# Altium PCB ESP_Layout_2.1.PcbDoc
Units mm, origin at the board's own origin, x right, y up, seen from the top; angles counter-clockwise.
Board outline 96.52 x 58.42 mm, 2 copper layers (Top Layer, Bottom Layer); 39 components, 25 nets, 166 pads, 23 vias.
Unrouted connection lines stored in the file: 46.
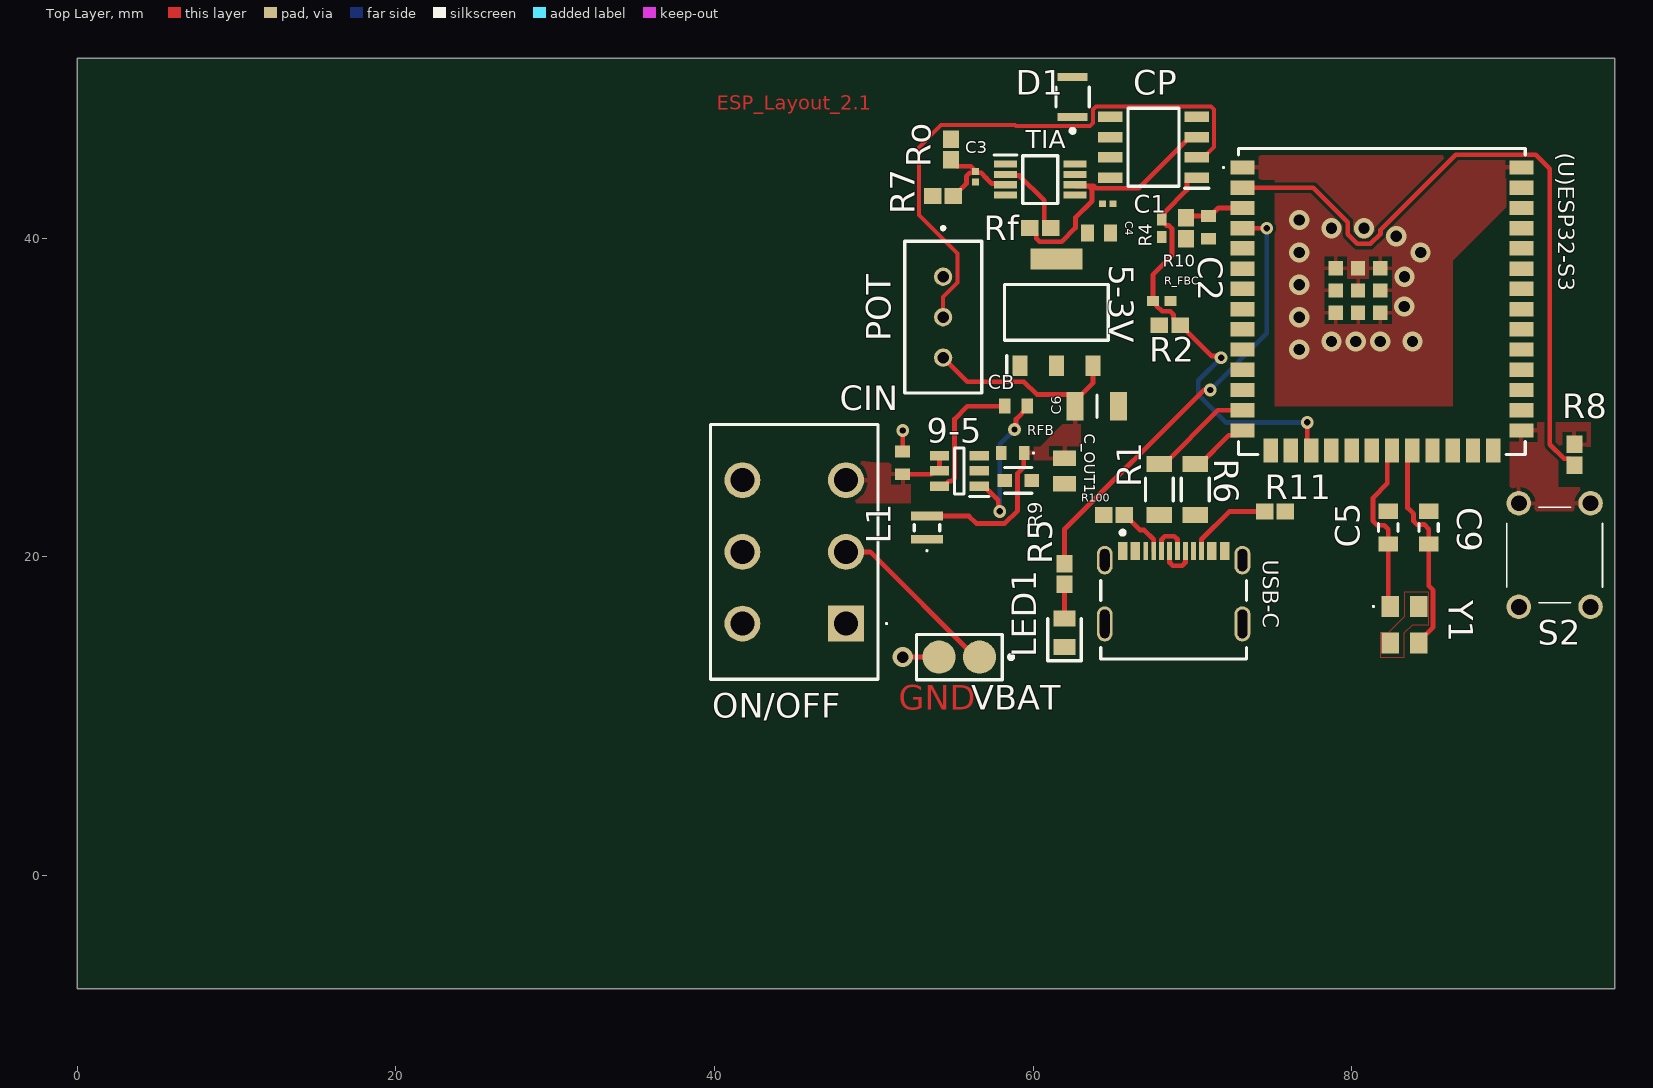
[diagram p0: Top Layer view]
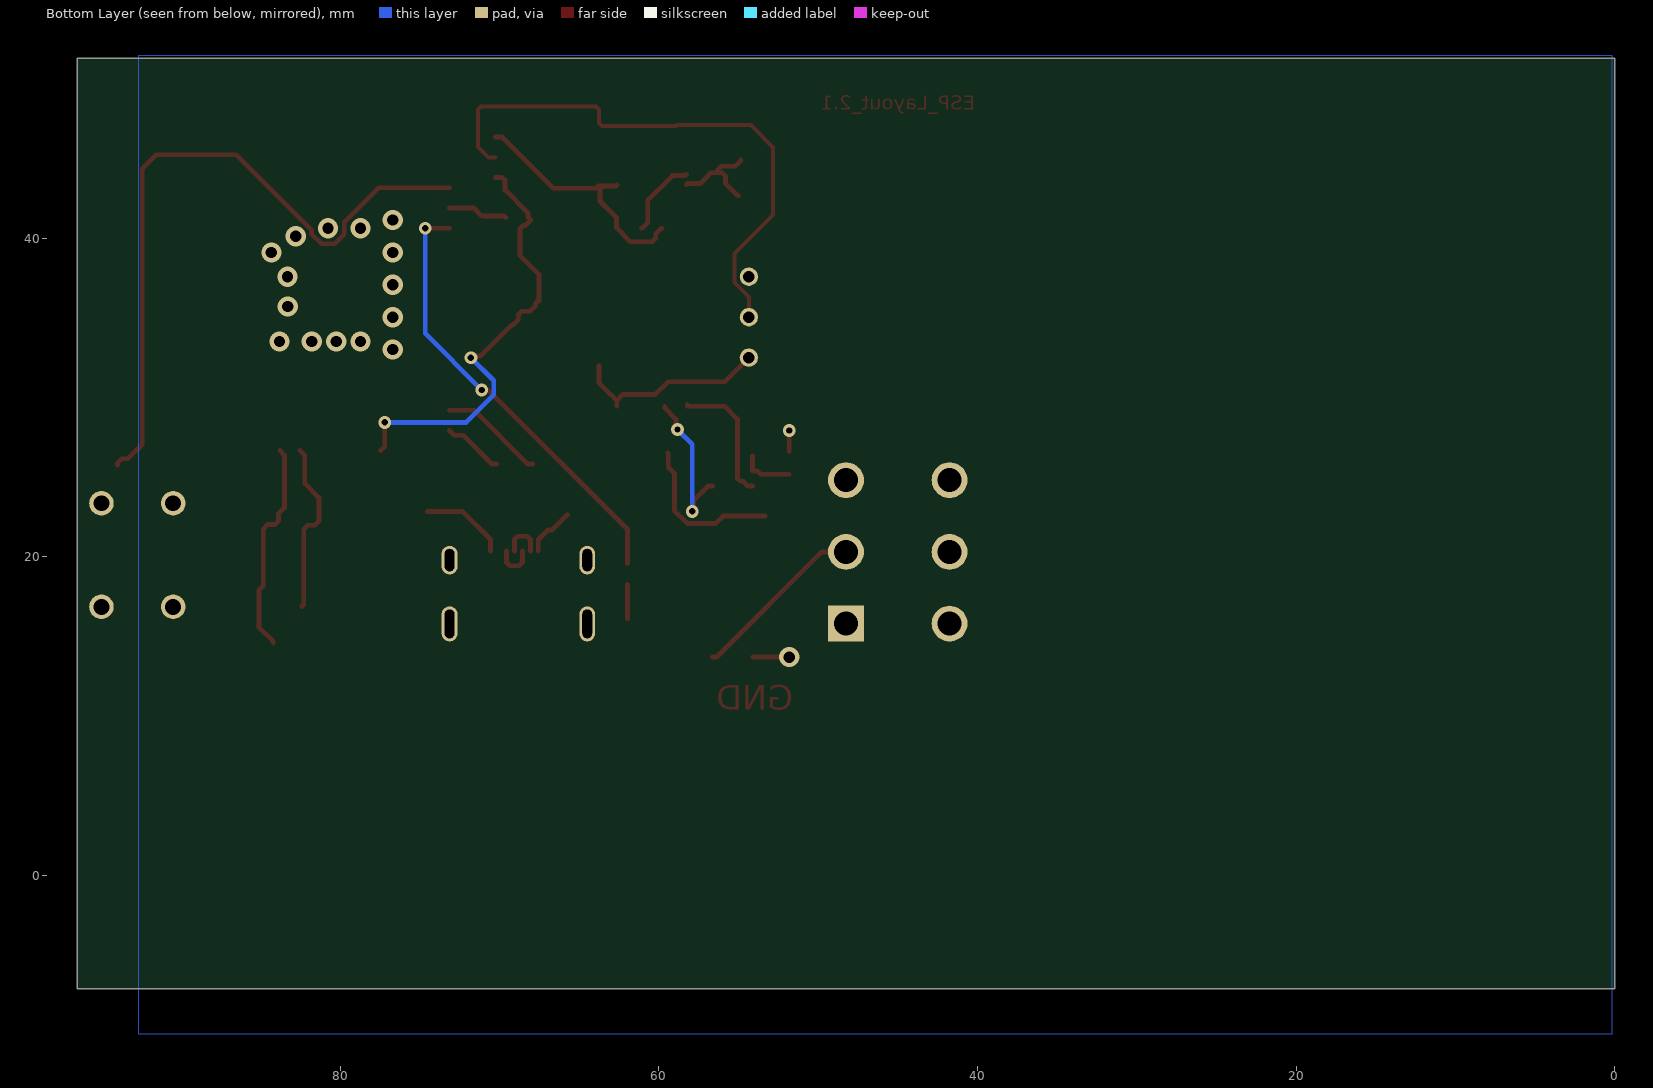
[diagram p1: Bottom Layer view, seen from below]
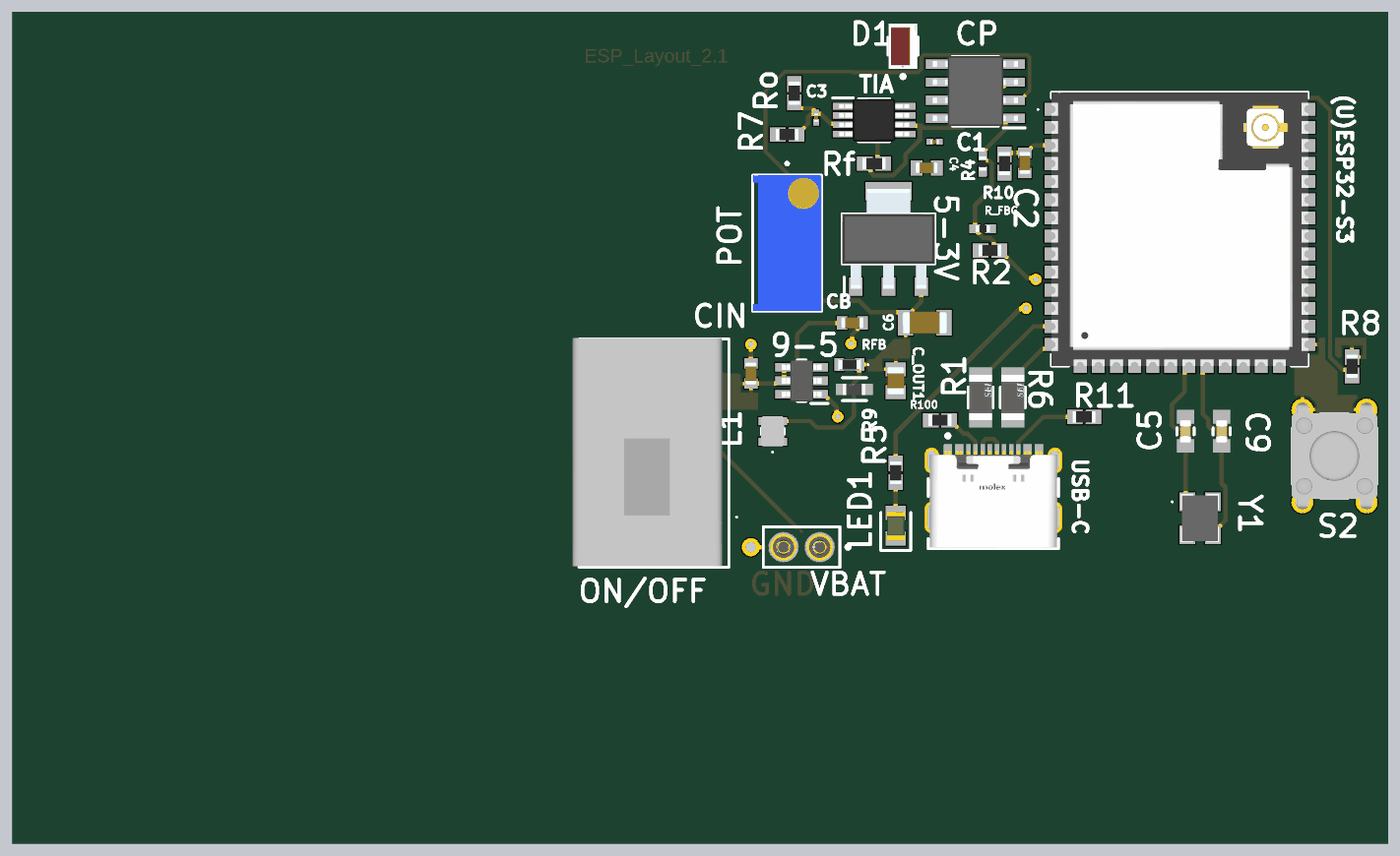
[diagram p2: 3D render of the assembled board from above, using the file's embedded part models]

## Layer stack, top to bottom
Top Solder: solder mask 0.0102, Solder Resist, Dk 3.5
Top Layer: signal copper 0.0356
Dielectric 1: dielectric 0.32, FR-4, Dk 4.8
Bottom Layer: signal copper 0.0356
Bottom Solder: solder mask 0.0102, Solder Resist, Dk 3.5

## Board outline
0,-7.112 0,51.308 96.52,51.308 96.52,-7.112

## Design rules (kind name [scope] priority, off if disabled: settings)
Clearance [All] p1: gap=0.2 ignorepadtopadclearanceinfootprint=FALSE
DiffPairsRouting [All] p1: maxlimit=0.254 minlimit=0.254 mostfreqgap=0.254 toplayer_minwidth=0.381 toplayer_maxwidth=0.381 toplayer_prefwidth=0.381 bottomlayer_minwidth=0.381 bottomlayer_maxwidth=0.381 bottomlayer_prefwidth=0.381 maxuncoupledlength=12.7
HoleSize [All] p1: absolutevalues=TRUE maxlimit=5 minlimit=0.3 maxpercent=80.000 minpercent=20.000
MinimumSolderMaskSliver [All] p1: minsoldermaskwidth=0.102
PolygonConnect [All] p1: thpad.connectstyle=Relief thpad.reliefconductorwidth=0.254 thpad.reliefentries=4 thpad.polygonreliefangle="90 Angle" thpad.airgapwidth=0.254 smdpad.connectstyle=Relief smdpad.reliefconductorwidth=0.254 smdpad.reliefentries=4 smdpad.polygonreliefangle="90 Angle" smdpad.airgapwidth=0.254 via.connectstyle=Direct via.reliefconductorwidth=0.254 via.reliefentries=4 via.polygonreliefangle="90 Angle" via.airgapwidth=0.254
RoutingVias [All] p1: holewidth=0.4 width=0.8 viastyle="Through Hole" minholewidth=0.3 minwidth=0.7 maxholewidth=0.7 maxwidth=1
SilkToSolderMaskClearance [IsPad] p1: minsilkscreentomaskgap=0.15 clearancetoexposedcopper=TRUE
SolderMaskExpansion [All] p1: expansion=0.102 istentingtop=FALSE
SupplyNets "Schematic Supply Nets_4" [InNet('GND')] p1: voltage=0.000
SupplyNets "Schematic Supply Nets_3" [InNet('5V_CLEAN')] p2: voltage=0.000
SupplyNets "Schematic Supply Nets_2" [InNet('VBAT_SW')] p3: voltage=0.000
SupplyNets "Schematic Supply Nets_1" [InNet('3V3_CLEAN')] p4: voltage=0.000
SupplyNets "Schematic Supply Nets" [InNet('VBAT')] p5: voltage=0.000
Width [All] p1: maxlimit=1 minlimit=0.2 preferedwidth=0.3
26 further rules are at their usual default settings.

## Classes and differential pairs
component class V_Reg: 5-3V 9-5 C4 C6 C_OUT1 CB CIN L1 ON/OFF R9 RFB VBAT
component class Receiver: C1 C3 CP D1 pot R2 R4 R7 R_FBC Rf Ro TIA
component class ESP: (U)ESP32-S3 C2 C5 C9 LED1 R1 R5 R6 R8 R10 R11 R100 S2 USB-C Y1
differential pair USB: +USB_P -USB_N

## Components (designator, comment, footprint, x,y, rotation, side; value= is the part's Value field where it differs from the comment)
5-3V "AMS1117-3.3" SOT229P700X180-4N 61.468,35.354 r90 top (schematic designator IC3)
9-5 "LMR50410Y5FQDBVRQ1" SOT95P280X145-6N 55.372,25.4 r180 top
(U)ESP32-S3 "ESP32-S3-WROOM-1U-N8R8" ESP32S3WROOM1UN8R8 81.902,36.04 r0 top (schematic designator IC1)
C1 "0.1uF" CAPC0603X33N 64.694,42.164 r180 top
C2 "1uF" CAPC1608X90N 71.026,40.69 r270 top
C3 "0.1uF" CAPC0603X33N 56.388,43.866 r90 top
C4 "22uF" CAPC1608X105N 64.145,40.346 r180 top
C5 "8pF" FP-CGA3E-0_3-0_1-IPC_A 82.296,21.844 r90 top
C6 "10uF" CAPC3216X180N 64.008,29.464 r180 top
C9 "8pF" FP-CGA3E-0_3-0_1-IPC_A 84.836,21.844 r90 top
C_OUT1 "10uF" CAPC2012X140N 61.976,25.4 r270 top (schematic designator C_CLEAN)
CB "0.1uF" CAPC1608X90N 58.928,29.464 r180 top
CIN "2.2uF" CAPC1608X90N 51.816,25.908 r90 top
CP "LM393DR2GH" SOIC127P600X175-8N 67.564,45.72 r180 top (schematic designator IC4)
D1 "SFH 2713" FP-SFH_2713-MFG 62.484,48.877 r90 top
L1 "4.7uH" 621767970 53.34,21.844 r90 top
LED1 "LTST-C170GKT" LEDC2012X120N 61.976,15.24 r90 top
ON/OFF "SLW-1678105-6A-N-D" SLW16781056AND 48.26,15.82 r90 top (schematic designator S1)
POT "3296W-1-104LF" 3296W1503LF 54.356,37.592 r90 top (schematic designator VR1)
R1 "RMCF1206ZT0R00" FP-RMCF1206-MFG 67.926,24.231 r90 top
R2 "10k" RESC1608X55N 68.58,34.544 r180 top
R4 "100k" RESC1005X40N 68.072,40.64 r90 top
R5 "130Ω" RESC1608X55N 61.976,18.938 r90 top
R6 "RMCF1206ZT0R00" FP-RMCF1206-MFG 70.181,24.231 r90 top
R7 "10k" RESC1608X55N 54.356,42.672 r0 top
R8 "10kΩ" RESC1608X55N 93.98,26.416 r270 top
R9 "22.1kΩ" FP-RT0603-MFG 59.078,24.802 r180 top value=22.1KΩ
R10 "10kΩ" RESC1608X55N 69.596,40.64 r270 top
R11 "5.1kΩ" RESC1608X55N 75.184,22.86 r0 top
R100 "5.1kΩ" RESC1608X55N 65.076,22.632 r180 top
R_FBC "100k" RESC1005X40N 68.072,36.068 r180 top
Rf "10k" RESC1608X55N 60.452,40.64 r180 top (schematic designator R3)
RFB "88.7kΩ" ERA3AEB101V 58.729,26.532 r180 top (schematic designator R_FBT)
Ro "10k" RESC1608X55N 54.864,45.578 r90 top (schematic designator R5.1)
S2 "RST_SW" 18259106 94.996,23.368 r270 top
TIA "OPA380AIDGKR" SOP65P490X110-8N 60.452,43.688 r0 top (schematic designator U1)
USB-C "217179-0001" FP-2171790001-MFG 68.821,16.952 r0 top (schematic designator "USB OTG")
VBAT "837-22-002-30-001101" FP-837-22-002-30-001101-MFG 55.372,13.716 r180 top
Y1 "ECS-80-8-33Q-ADS" ECS80833QADS 83.312,15.748 r270 top

## Footprints (in the part's own frame and the unit in brackets; to place one, negate y for a bottom-side part, rotate by r counter-clockwise, add the part's x,y. Pads: shape width x height; smd on the part's side, far side on the other; paste and mask are expansions set on the pad)
3296W1503LF [mm]
  round 1.15 hole 0.71: 1(0,0) 2(-2.54,0) 3(-5.08,0)
  silkscreen extent -7.3,-2.42 3.15,2.41, body extent -7.3,-2.41 2.22,2.41, height 11.54
18259106 [mm]
  round 1.54 hole 0.99: 1(0,0) 2(6.5,0) 3(0,-4.5) 4(6.5,-4.5)
  silkscreen extent 0.25,-5.25 6.25,0.75, body extent -0.65,-5.25 7.15,0.74, height 5.64
621767970 [mm]
  rect 0.55x2 smd: 1(-0.725,0) 2(0.725,0)
  silkscreen extent -1.5,-0.8 0.2,0.8, body extent -1.05,-0.8 1.05,0.8, height 1.1
CAPC0603X33N [mm]
  rect 0.46x0.42 smd: 1(-0.33,0) 2(0.33,0)
  body extent -0.3,-0.15 0.3,0.15, height 0.33
CAPC1608X90N [mm]
  rect 0.73x0.94 smd: 1(-0.71,0) 2(0.71,0)
  body extent -0.8,-0.4 0.8,0.4, height 0.9
CAPC1608X105N [mm]
  rect 0.83x1.07 smd: 1(-0.72,0) 2(0.72,0)
  body extent -0.8,-0.4 0.8,0.4, height 1.05
CAPC2012X140N [mm]
  rect 0.98x1.43 smd: 1(-0.8,0) 2(0.8,0)
  body extent -1,-0.63 1,0.63, height 1.4
CAPC3216X180N [mm]
  rect 1.07x1.78 smd: 1(-1.36,0) 2(1.36,0)
  silkscreen extent 0,-0.7 0,0.7, body extent -1.6,-0.8 1.6,0.8, height 1.8
ECS80833QADS [mm]
  rect 1.3x1.1 smd: 1(-1.15,-0.9) 2(1.15,-0.9) 3(1.15,0.9) 4(-1.15,0.9)
  silkscreen extent -1.2,-2 -1.1,-1.9, body extent -1.69,-1.34 1.69,1.34, height 0.9
ERA3AEB101V [mm]
  rect 0.65x0.9 smd: 1(-0.725,0) 2(0.725,0)
  silkscreen extent -1.35,-0.05 -1.25,0.05, body extent -0.8,-0.4 0.8,0.4, height 0.45
ESP32S3WROOM1UN8R8 [mm]
  rect 1.5x0.9 smd: 1(-8.75,8.41) 2(-8.75,7.14) 3(-8.75,5.87) 4(-8.75,4.6) 5(-8.75,3.33) 6(-8.75,2.06) 7(-8.75,0.79) 8(-8.75,-0.48) 9(-8.75,-1.75) 10(-8.75,-3.02) 11(-8.75,-4.29) 12(-8.75,-5.56) 13(-8.75,-6.83) 14(-8.75,-8.1) 27(8.75,-8.1) 28(8.75,-6.83) 29(8.75,-5.56) 30(8.75,-4.29) 31(8.75,-3.02) 32(8.75,-1.75) 33(8.75,-0.48) 34(8.75,0.79) 35(8.75,2.06) 36(8.75,3.33) 37(8.75,4.6) 38(8.75,5.87) 39(8.75,7.14) 40(8.75,8.41)
  rect 0.9x1.5 smd: 15(-6.985,-9.35) 16(-5.715,-9.35) 17(-4.445,-9.35) 18(-3.175,-9.35) 19(-1.905,-9.35) 20(-0.635,-9.35) 21(0.635,-9.35) 22(1.905,-9.35) 23(3.175,-9.35) 24(4.445,-9.35) 25(5.715,-9.35) 26(6.985,-9.35)
  rect 0.9x0.9 smd: 41(-1.5,0.69) 42(-2.9,2.09) 43(-2.9,0.69) 44(-2.9,-0.71) 45(-1.5,-0.71) 46(-0.1,-0.71) 47(-0.1,0.69) 48(-0.1,2.09) 49(-1.5,2.09)
  silkscreen extent -10,-9.6 9,9.6, body extent -9.01,-9.61 9.01,9.6, height 3.25
FP-837-22-002-30-001101-MFG [mm]
  round 2.08 smd paste+0 mask+0: 1(-1.27,0) 2(1.27,0)
  silkscreen extent -3.38,-1.42 2.69,1.42, body extent -2.64,-1.37 2.64,1.37, height 0.25
FP-2171790001-MFG [mm]
  rrect100% 1x1.8 hole 1.4 slot 0.6 at 0 deg paste-2539.97 mask+0: 1(-4.32,2.85) 2(4.32,2.85)
  rrect100% 1x2.2 hole 1.8 slot 0.6 at 0 deg paste-2539.97 mask+0: 3(-4.32,-1.15) 4(4.32,-1.15)
  rect 0.6x1.15 smd paste+0 mask+0: A1-B12(-3.2,3.425) A4-B9(-2.4,3.425) B1-A12(3.2,3.425) B4-A9(2.4,3.425)
  rect 0.3x1.15 smd paste+0 mask+0: A5(-1.25,3.425) A6(-0.25,3.425) A7(0.25,3.425) A8(1.25,3.425) B5(1.75,3.425) B6(0.75,3.425) B7(-0.75,3.425) B8(-1.75,3.425)
  silkscreen extent -4.57,-3.35 4.57,4.7, body extent -4.92,-3.45 4.92,4.1, height 0.25
FP-CGA3E-0_3-0_1-IPC_A [mm]
  rect 0.956x1.206 smd paste+0 mask+0: 1(-1.025,0) 2(1.025,0)
  silkscreen extent -0.25,-0.6 0.25,0.6, body extent -2,-1.1 2,1.1, height 0.25
FP-RMCF1206-MFG [mm]
  rect 1x1.6 smd paste+0 mask+0: 1(-1.6,0) 2(1.6,0)
  silkscreen extent -0.72,-0.87 0.72,0.87, body extent -2.2,-0.97 2.2,0.97, height 0.25
FP-RT0603-MFG [mm]
  rect 0.9x0.8 smd paste+0 mask+0: 1(-0.85,0) 2(0.85,0)
  silkscreen extent -0.85,-0.81 0.86,0.8, body extent -1.4,-0.55 1.4,0.55, height 0.25
FP-SFH_2713-MFG [mm]
  rect 0.5x1.9 smd paste-1000 mask+0: 1(-1.25,0) 2(1.25,0)
  silkscreen extent -2.25,-1.05 0.63,1.05, body extent -1.75,-1.15 1.75,1.15, height 0.25
LEDC2012X120N [mm]
  rect 1x1.4 smd: 1(-0.9,0) 2(0.9,0)
  silkscreen extent -1.75,-1.05 0.9,1.05, body extent -1.03,-0.63 0.97,0.63, height 1.2
RESC1005X40N [mm]
  rect 0.75x0.6 smd: 1(-0.55,0) 2(0.55,0)
  body extent -0.5,-0.25 0.5,0.25, height 0.4
RESC1608X55N [mm]
  rect 1.1x1 smd: 1(-0.65,0) 2(0.65,0)
  body extent -0.8,-0.4 0.8,0.4, height 0.55
SLW16781056AND [mm]
  rect 2.25x2.25 hole 1.5: 1(0,0)
  round 2.25 hole 1.5: 2(4.5,0) 3(9,0) 4(9,6.5) 5(4.5,6.5) 6(0,6.5)
  silkscreen extent -3.5,-2.6 12.5,8.5, body extent -3.43,-1.52 12.57,8.98, height 13.82
SOIC127P600X175-8N [mm]
  rect 1.525x0.65 smd: 1(-2.712,1.905) 2(-2.712,0.635) 3(-2.712,-0.635) 4(-2.712,-1.905) 5(2.712,-1.905) 6(2.712,-0.635) 7(2.712,0.635) 8(2.712,1.905)
  silkscreen extent -3.47,-2.45 1.6,2.58, body extent -3,-2.45 3,2.45, height 1.75
SOP65P490X110-8N [mm]
  rect 1.45x0.45 smd: 1(-2.175,0.975) 2(-2.175,0.325) 3(-2.175,-0.325) 4(-2.175,-0.975) 5(2.175,-0.975) 6(2.175,-0.325) 7(2.175,0.325) 8(2.175,0.975)
  silkscreen extent -2.9,-1.5 1.1,1.55, body extent -2.45,-1.5 2.45,1.5, height 1.1
SOT95P280X145-6N [mm]
  rect 1.2x0.6 smd: 1(-1.25,0.95) 2(-1.25,0) 3(-1.25,-0.95) 4(1.25,-0.95) 5(1.25,0) 6(1.25,0.95)
  silkscreen extent -1.85,-1.45 0.3,1.6, body extent -1.4,-1.45 1.4,1.45, height 1.2
SOT229P700X180-4N [mm]
  rect 1.3x0.95 smd: 1(-3.35,2.29) 2(-3.35,0) 3(-3.35,-2.29)
  rect 1.3x3.25 smd: 4(3.35,0)
  silkscreen extent -4,-3.25 1.75,3.25, body extent -3.5,-3.25 3.5,3.25, height 1.8

## Part data
5-3V: "Integrated Circuit", Manufacturer_Name="Advanced Monolithic Systems", Datasheet Link=http://www.advanced-monolithic.com/pdf/ds1117.pdf, Height=1.8mm, Manufacturer_Part_Number=AMS1117-3.3
9-5: "Integrated Circuit", Manufacturer_Name="Texas Instruments", Mouser Part Number=595-R50410Y5FQDBVRQ1, Arrow Part Number=LMR50410Y5FQDBVRQ1, Arrow Price/Stock=https://www.arrow.com/en/products/lmr50410y5fqdbvrq1/texas-instruments?utm_currency=USD&region=nac, Datasheet Link=https://www.ti.com/lit/ds/symlink/lmr50410-q1.pdf, Height=1.45mm, Manufacturer_Part_Number=LMR50410Y5FQDBVRQ1, Mouser Price/Stock=https://www.mouser.co.uk/ProductDetail/Texas-Instruments/LMR50410Y5FQDBVRQ1?qs=81r%252BiQLm7BR57cLsTbTr9w%3D%3D
(U)ESP32-S3: "Integrated Circuit", Manufacturer_Name="Espressif Systems", Mouser Part Number=356-ESP32S3WRM1UN8R8, Datasheet Link=https://www.espressif.com/sites/default/files/documentation/esp32-s3-wroom-1_wroom-1u_datasheet_en.pdf, Height=3.35mm, Manufacturer_Part_Number=ESP32-S3-WROOM-1U-N8R8, Mouser Price/Stock=https://www.mouser.co.uk/ProductDetail/Espressif-Systems/ESP32-S3-WROOM-1U-N8R8?qs=Li%252BoUPsLEnvOglIa3CypaQ%3D%3D
C1 C3: library part GRM033C71C104KE14D, "Capacitor", Manufacturer_Name="Murata Electronics", Mouser Part Number=81-GRM33C71C104KE14D, Arrow Part Number=GRM033C71C104KE14D, Arrow Price/Stock=https://www.arrow.com/en/products/grm033c71c104ke14d/murata-manufacturing?region=nac, Datasheet Link=https://search.murata.co.jp/Ceramy/image/img/A01X/G101/ENG/GRM033C71C104KE14-01A.pdf, Height=0.33mm, Manufacturer_Part_Number=GRM033C71C104KE14D, Mouser Price/Stock=https://www.mouser.co.uk/ProductDetail/Murata-Electronics/GRM033C71C104KE14D?qs=P%2FC4Eoq9CDzkjc0H6wJP9A%3D%3D
C2: library part CL10B105KP8NNNC, "Capacitor", Manufacturer_Name=SAMSUNG, Mouser Part Number=187-CL10B105KP8NNNC, Arrow Part Number=CL10B105KP8NNNC, Arrow Price/Stock=https://www.arrow.com/en/products/cl10b105kp8nnnc/samsung-electro-mechanics?utm_currency=USD&region=nac, Datasheet Link=https://media.digikey.com/pdf/Data%20Sheets/Samsung%20PDFs/CL_Series_MLCC_ds.pdf, Height=0.9mm, Manufacturer_Part_Number=CL10B105KP8NNNC, Mouser Price/Stock=https://www.mouser.co.uk/ProductDetail/Samsung-Electro-Mechanics/CL10B105KP8NNNC?qs=X6jEic%2FHinD9krOsbkFZow%3D%3D
C4: library part CL10A226MP8NUNE, "Capacitor", Manufacturer_Name=SAMSUNG, Mouser Part Number=187-CL10A226MP8NUNE, Arrow Part Number=CL10A226MP8NUNE, Arrow Price/Stock=https://www.arrow.com/en/products/cl10a226mp8nune/samsung-electro-mechanics?utm_currency=USD&region=europe, Datasheet Link=https://datasheet.datasheetarchive.com/originals/distributors/Datasheets-DGA10/2407063.pdf, Height=1.05mm, Manufacturer_Part_Number=CL10A226MP8NUNE, Mouser Price/Stock=https://www.mouser.co.uk/ProductDetail/Samsung-Electro-Mechanics/CL10A226MP8NUNE?qs=gRKWieUq2Hb5O0PTfRKzDQ%3D%3D
C5 C9: library part CMP-08246-000516-1, "Cap Ceramic 8pF 50V C0G 0.5pF Pad SMD 0603 +125°C Automotive T/R", Case Code (Imperial)=0603, Case Code (Metric)=1608, Dielectric=C0G, Max Operating Temperature=125°C, Min Operating Temperature=-55°C, Package Quantity=4000, Ratings=AEC-Q200, Voltage Rating=50V, Capacitance=8pF, Case/Package=0603, Composition=Ceramic, Depth=0.8mm, Height=0.8mm, Length=1.6mm, Mount="Surface Mount", Packaging="Tape and Reel", Radiation Hardening=No, REACH SVHC="No SVHC", Termination=SMD/SMT, Thickness=0.035inch, Voltage Rating (DC)=50V, Weight=7.1E-05oz, Width=0.031inch
C6: library part CL31B106KAHNNNE, "Capacitor", Manufacturer_Name=SAMSUNG, Mouser Part Number=187-CL31B106KAHNNNE, Arrow Part Number=CL31B106KAHNNNE, Arrow Price/Stock=https://www.arrow.com/en/products/cl31b106kahnnne/samsung-electro-mechanics?utm_currency=USD&region=europe, Datasheet Link=https://datasheet.datasheetarchive.com/originals/distributors/Datasheets_SAMA/d94547340e0e9d2be5f415b64e4e2f0a.pdf, Height=1.8mm, Manufacturer_Part_Number=CL31B106KAHNNNE, Mouser Price/Stock=https://www.mouser.co.uk/ProductDetail/Samsung-Electro-Mechanics/CL31B106KAHNNNE?qs=349EhDEZ59r5EZhnLOTsYA%3D%3D
C_OUT1: library part CL21B106KOQNNNE, "Capacitor", Manufacturer_Name=SAMSUNG, Mouser Part Number=187-CL21B106KOQNNNE, Arrow Part Number=CL21B106KOQNNNE, Arrow Price/Stock=https://www.arrow.com/en/products/cl21b106koqnnne/samsung-electro-mechanics?utm_currency=USD&region=europe, Datasheet Link=https://datasheet.datasheetarchive.com/originals/distributors/Datasheets_SAMA/a6a503886ec2e900bbf4e5d6e2f8e8b0.pdf, Height=1.4mm, Manufacturer_Part_Number=CL21B106KOQNNNE, Mouser Price/Stock=https://www.mouser.co.uk/ProductDetail/Samsung-Electro-Mechanics/CL21B106KOQNNNE?qs=349EhDEZ59r8qgLddyW2Yw%3D%3D
CB: library part CC0603KRX7R7BB104, "Capacitor", Manufacturer_Name=YAGEO, Mouser Part Number=603-CC603KRX7R7BB104, Arrow Part Number=CC0603KRX7R7BB104, Arrow Price/Stock=https://www.arrow.com/en/products/cc0603krx7r7bb104/yageo?utm_currency=USD&region=europe, Datasheet Link=https://www.yageo.com/en/Chart/Download/pdf/CC0603KRX7R7BB104, Height=0.9mm, Manufacturer_Part_Number=CC0603KRX7R7BB104, Mouser Price/Stock=https://www.mouser.co.uk/ProductDetail/YAGEO/CC0603KRX7R7BB104?qs=AgBp2OyFlx8KPmNTlFoWXA%3D%3D
CIN: library part CL10A225KO8NNNC, "Capacitor", Manufacturer_Name=SAMSUNG, Mouser Part Number=187-CL10A225KO8NNNC, Arrow Part Number=CL10A225KO8NNNC, Arrow Price/Stock=https://www.arrow.com/en/products/cl10a225ko8nnnc/samsung-electro-mechanics?region=europe, Datasheet Link=https://lcsc.componentsearchengine.com/Datasheets/2/CL10A225KO8NNNC.pdf, Height=0.9mm, Manufacturer_Part_Number=CL10A225KO8NNNC, Mouser Price/Stock=https://www.mouser.co.uk/ProductDetail/Samsung-Electro-Mechanics/CL10A225KO8NNNC?qs=hqM3L16%252BxlecoJxUp5hKOw%3D%3D
CP: "Integrated Circuit", Manufacturer_Name=onsemi, Mouser Part Number=863-LM393DR2GH, Arrow Part Number=LM393DR2GH, Arrow Price/Stock=https://www.arrow.com/en/products/lm393dr2gh/on-semiconductor?region=nac, Datasheet Link=https://www.arrow.com/en/products/lm393dr2gh/on-semiconductor, Height=1.75mm, Manufacturer_Part_Number=LM393DR2GH, Mouser Price/Stock=https://www.mouser.co.uk/ProductDetail/onsemi/LM393DR2GH?qs=VZGfJwuufXYqyz8qorfXHA%3D%3D
D1: library part CMP-62027-000005-1, "Photodiodes Silicon PIN Photodiode 635 nm"
L1: library part 7-2176797-1, "Inductor", Manufacturer_Name="TE Connectivity", Datasheet Link=https://www.te.com/commerce/DocumentDelivery/DDEController?Action=srchrtrv&DocNm=1773151-4&DocType=Data%20Sheet&DocLang=English&DocFormat=pdf&PartCntxt=2176797-45, Height=1mm, Manufacturer_Part_Number=7-2176797-1
LED1: "LED", Manufacturer_Name=Lite-On, Mouser Part Number=859-LTST-C170GKT, Arrow Part Number=LTST-C170GKT, Arrow Price/Stock=https://www.arrow.com/en/products/ltst-c170gkt/lite-on-technology?utm_currency=USD&region=europe, Datasheet Link=https://mm.digikey.com/Volume0/opasdata/d220001/medias/docus/895/LTST-C170GKT.pdf, Height=1.2mm, Manufacturer_Part_Number=LTST-C170GKT, Mouser Price/Stock=https://www.mouser.co.uk/ProductDetail/LITEON/LTST-C170GKT?qs=%2FSqKn2EfXQSV5aRij3YIfQ%3D%3D
ON/OFF: "Switch", Manufacturer_Name="Same Sky", Mouser Part Number=179-SLW16781056AND, Arrow Part Number=SLW-1678105-6A-N-D, Arrow Price/Stock=https://www.arrow.com/en/products/slw-1678105-6a-n-d/cui-devices?utm_currency=USD&region=nac, Datasheet Link=https://www.sameskydevices.com/product/resource/SLW-1678105-6A-N-D.pdf, Height=14.5mm, Manufacturer_Part_Number=SLW-1678105-6A-N-D, Mouser Price/Stock=https://www.mouser.co.uk/ProductDetail/Same-Sky/SLW-1678105-6A-N-D?qs=IKkN%2F947nfCWfuHPg7jcWw%3D%3D
POT: "Variable Resistor", Manufacturer_Name=Bourns, Mouser Part Number=652-3296W-1-104LF, Arrow Part Number=3296W-1-104LF, Arrow Price/Stock=https://www.arrow.com/en/products/3296w-1-104lf/bourns?utm_currency=USD&region=europe, Datasheet Link=https://datasheet.datasheetarchive.com/originals/distributors/Datasheets-10/DSA-187647.pdf, Height=10.28mm, Manufacturer_Part_Number=3296W-1-104LF, Mouser Price/Stock=https://www.mouser.co.uk/ProductDetail/Bourns/3296W-1-104LF?qs=NxuKWO2Bm4Yv9t2iisRb6w%3D%3D
R1 R6: library part CMP-26527-005649-1, "0Ω ±0 0.25W 1206 Thick Film Chip Resistor AEC-Q200 compliant", Case Code (Imperial)=1206, Case Code (Metric)=3216, Current Rating=2A, Max Operating Temperature=155°C, Max Power Dissipation=250mW, Min Operating Temperature=-55°C, Resistance=0R, Resistor Type="Thick Film", Working Voltage=200V, Case/Package=1206, Construction=Rectangular, Contact Plating=Tin, Depth=1.6mm, Features="Automotive AEC-Q200", Height=0.028inch, Lead Free="Lead Free", Length=0.126inch, Military Standard=Not, Mount="Surface Mount", Number of Terminations=2, Packaging="Tape and Reel", Power Rating=250mW, Radiation Hardening=No, RoHS Compliant=Yes, Series=RMCF, Technology="THICK FILM", Width=0.063inch
R2 R7 R8 R10 Rf Ro: library part RC0603FR0710KL, "Resistor", Manufacturer_Name=KEMET, Arrow Part Number=RC0603FR0710KL, Arrow Price/Stock=https://www.arrow.com/en/products/rc0603fr-0710kl/yageo, Datasheet Link=http://www.yageo.com/documents/recent/PYu-RC0603_51_RoHS_L_v5.pdf, Height=0.55mm, Manufacturer_Part_Number=RC0603FR0710KL
R4 R_FBC: library part R0402_1%_100_K__RC0402FR-07100KL_, "Resistor", Manufacturer_Name=YAGEO, Manufacturer_Part_Number="R0402 1% 100 K (RC0402FR-07100KL)", Datasheet Link=https://www.yageo.com/upload/media/product/products/datasheet/rchip/PYu-RC_Group_51_RoHS_L_12.pdf, Height=0.4mm
R5: library part RC0603FR-07130RL, "Resistor", Manufacturer_Name=YAGEO, Datasheet Link=https://www.mouser.com/catalog/specsheets/YAGEO_PYu_RC_Group_51_RoHS_L_12.pdf, Height=0.55mm, Manufacturer_Part_Number=RC0603FR-07130RL
R9: library part CMP-2000-04404-2, "RES 22.1K OHM 1/10W .1% SMD 0603", Manufacturer=Yageo, Manufacturer Part Number=RT0603BRD0722K1L, Package=RT0603, Power Rating=0.1W, Resistance=22.1KΩ, Temperature="-55°C to +155°C", Temperature Coefficient="25 ppm/°C", Temperature Range High=+155°C, Temperature Range Low=-55°C, Tolerance=0.001, Voltage Rating=75V, Automotive=No, Category=Res, ComponentLink2Description=Datasheet, ComponentLink2URL=http://www.yageo.com/documents/recent/PYu-RT_1-to-0.01_RoHS_L_9.pdf, Composition="Thin Film", Device Class L1="Passive Components", Device Class L2=Resistors, Device Class L3="Chip SMD Resistors", Digikey Description="RES 22.1K OHM 1/10W .1% SMD 0603", Footprint Url=http://www.yageo.com/exep/pages/download/literatures/PYu-R_Mount_10.pdf, Height=0.55mm, Ipc Land Pattern Name=RESC16080X45, Lead Free=Yes, Mouser Description="Res Thin Film 0603 22.1K Ohm 0.1% 1/10W ±25ppm/°C SMD Paper T/R", Octopart=https://octopart.com/rt0603brd0722k1l-yageo-1430878, RoHS=TRUE, Series=RT
R11 R100: library part RC0603FR-075K1L, "Resistor", Manufacturer_Name=KEMET, Mouser Part Number=603-RC0603FR-075K1L, Arrow Part Number=RC0603FR-075K1L, Arrow Price/Stock=https://www.arrow.com/en/products/rc0603fr-075k1l/yageo?region=nac, Datasheet Link=http://www.yageo.com/documents/recent/PYu-RC0603_51_RoHS_L_v5.pdf, Height=0.55mm, Manufacturer_Part_Number=RC0603FR-075K1L, Mouser Price/Stock=https://www.mouser.co.uk/ProductDetail/YAGEO/RC0603FR-075K1L?qs=gt6vzsuosg2jUUwxnI2PJQ%3D%3D
RFB: library part ERA-3AEB8872V, "Resistor", Manufacturer_Name=Panasonic, Mouser Part Number=667-ERA-3AEB8872V, Arrow Part Number=ERA-3AEB8872V, Arrow Price/Stock=https://www.arrow.com/en/products/era-3aeb8872v/panasonic?region=nac, Datasheet Link=https://industrial.panasonic.com/cdbs/www-data/pdf/RDM0000/AOA0000C307.pdf, Height=0.55mm, Manufacturer_Part_Number=ERA-3AEB8872V, Mouser Price/Stock=https://www.mouser.co.uk/ProductDetail/Panasonic/ERA-3AEB8872V?qs=nuXzIS8loXExOdAoV6n39Q%3D%3D
S2: library part 1825910-6, "Switch", Manufacturer_Name="TE Connectivity", Mouser Part Number=650-1825910-6, Arrow Part Number=1825910-6, Arrow Price/Stock=https://www.arrow.com/en/products/1825910-6/te-connectivity?utm_currency=USD&region=europe, Datasheet Link=https://www.te.com/commerce/DocumentDelivery/DDEController?Action=srchrtrv&DocNm=1308111-1_SWITCHES_CORE_PROGRAM_CATALOG&DocType=Catalog%20Section&DocLang=English&PartCntxt=1825910-6&DocFormat=pdf, Height=5.3mm, Manufacturer_Part_Number=1825910-6, Mouser Price/Stock=https://www.mouser.co.uk/ProductDetail/TE-Connectivity/1825910-6?qs=A6cQTCBcXncisYDS1KbpGA%3D%3D
TIA: "Undefined or Miscellaneous", Manufacturer_Name="Texas Instruments", Mouser Part Number=595-OPA380AIDGKR, Arrow Part Number=OPA380AIDGKR, Arrow Price/Stock=https://www.arrow.com/en/products/opa380aidgkr/texas-instruments?utm_currency=USD&region=europe, Datasheet Link=http://www.ti.com/general/docs/suppproductinfo.tsp?distId=26&gotoUrl=http%3A%2F%2Fwww.ti.com%2Flit%2Fgpn%2Fopa380, Height=1.1mm, Manufacturer_Part_Number=OPA380AIDGKR, Mouser Price/Stock=https://www.mouser.co.uk/ProductDetail/Texas-Instruments/OPA380AIDGKR?qs=7nS3%252BbEUL6se7xvHvUhv0w%3D%3D
USB-C: library part CMP-04767-000028-2, "CONN RCP USB2.0 TYP C 24P SMD RA", Current Rating=1.25A, Max Operating Temperature=85°C, Min Operating Temperature=-40°C, Voltage Rating=30V, Contact Material="Gold, Nickel", Gender=Receptacle, Height=3.36mm, NexarPartId=117190526, Number Of Contacts=16, USB Standard="USB 2.0"
VBAT: library part CMP-07791-000013-1, "CONN SPRING PISTON 2POS SMD", Current Rating=2A, Manufacturer=Mill-Max, Voltage Rating=150V, Automotive=No, Category=Conn, ComponentLink2Description=Datasheet, ComponentLink2URL=https://www.mill-max.com/catalog/download/2019-08%3A009.1M.pdf, Conn Gender=Male, Conn Orientation=Vertical, Contact Material=Gold,Nickel, Device Class L1=Connectors, Device Class L2="Headers and Wire Housings", Device Class L3=unset, Digikey Description="CONN SPRING PISTON 2POS SMD", Height=9.63mm, Lead Free=No, Manufacturer Part Number=837-22-002-30-001101, Number Of Contacts=2, Number Of Rows=1, Octopart=https://octopart.com/837-22-002-30-001101-mill-max-76383858, Package=837-22-002-30-001101, Pitch=2.54mm, RoHS=TRUE, Standoff Height=0.41mm
Y1: "Crystal or Oscillator", Manufacturer_Name=ECS, Mouser Part Number=520-ECS-80-8-33Q-ADS, Arrow Part Number=ECS-80-8-33Q-ADS, Arrow Price/Stock=https://www.arrow.com/en/products/ecs-80-8-33q-ads/ecs-international?region=nac, Datasheet Link=https://ecsxtal.com/store/pdf/ECX-33Q.pdf, Height=0.8mm, Manufacturer_Part_Number=ECS-80-8-33Q-ADS, Mouser Price/Stock=https://www.mouser.co.uk/ProductDetail/ECS/ECS-80-8-33Q-ADS?qs=hWgE7mdIu5RnrjF6MxWwaQ%3D%3D

## Via types
v1: diameter 1.27, hole 0.711, Top Layer to Bottom Layer, 16 vias
v2: diameter 0.8, hole 0.4, Top Layer to Bottom Layer, 7 vias

## Nets (pads, with @x,y where several pads share a name; then routed paths per layer and width w, separated by ;. In a path a pad name is that pad's centre, name@x,y a point inside that pad or via, vN(x,y) a via of type N, cw(c..) or ccw(c..) an arc to the next point about the centre after c; other vN are vias at no path point)
3V3_CLEAN: 5-3V.2 5-3V.4 (U)ESP32-S3.2 C1.2 C4.2 CP.8 D1.1 R2.2 R8.2 R10.2 Ro.2 TIA.7 | length 43.5
  Top Layer w0.3: 73.152,43.18 77.593,43.18 79.756,41.017 79.756,40.263 80.364,39.655 81.18,39.655 81.819,40.294 81.819,40.54 86.529,45.25 91.547,45.25 92.441,44.356 92.441,27.06 93.335,26.166 93.722,26.166 93.98,25.908 R8.2
5V_CLEAN: 5-3V.3 C6.2 C_OUT1.1 L1.2 POT.3 RFB.1 USB-C.A4-B9 USB-C.B4-A9 | length 22.4
  Top Layer w0.3: L1.2 55.977,22.569 56.436,22.11 58.223,22.11 59.028,22.915 59.028,25.247 59.413,25.632 59.413,26.49 RFB.1 ; POT.3 55.864,31.004 59.428,31.004 60.228,30.204 62.263,30.204 C6.2@62.648,29.819 ; C6.2 C6.2@62.648,29.819 ; 5-3V.3 63.758,30.904 63.058,30.204 63.033,30.204 C6.2@62.648,29.819
BOOT: (U)ESP32-S3.27 R8.1 S2.1 S2.3
FB: 9-5.3 R9.2 RFB.2
GND: 5-3V.1 9-5.2 (U)ESP32-S3.1 (U)ESP32-S3.40 (U)ESP32-S3.41 (U)ESP32-S3.42 (U)ESP32-S3.43 (U)ESP32-S3.44 (U)ESP32-S3.45 (U)ESP32-S3.46 (U)ESP32-S3.47 (U)ESP32-S3.48 (U)ESP32-S3.49 C1.1 C2.2 C3.1 C4.1 C5.2 C6.1 C9.2 C_OUT1.2 CIN.2 CP.4 CP.5 CP.6 LED1.1 POT.1 R7.1 R9.1 R11.2 R100.2 S2.2 S2.4 TIA.4 USB-C.1 USB-C.2 USB-C.3 USB-C.4 USB-C.A1-B12 USB-C.B1-A12 VBAT.2 Y1.2 Y1.4 | length 3.6
  Top Layer w0.3: v1(51.816,13.716) VBAT.2 ; CIN.2 v2(51.816,27.94)
  other v1: 76.708,33.02 78.74,33.528 80.264,33.528 81.788,33.528 83.82,33.528 76.708,35.052 83.307,35.72 76.708,37.084 83.312,37.592 76.708,39.116 84.328,39.116 82.804,40.132 78.74,40.64 80.772,40.64 76.708,41.148
Net9-5_1: 9-5.1 CB.1 | length 9.6
  Top Layer w0.3: 9-5.1 56.922,24.45 57.816,23.556 57.816,22.956 v2(57.912,22.86) ; v2(58.839,28.002) 58.935,28.098 58.935,28.656 59.638,29.359 CB.1
  Bottom Layer w0.3: v2(57.912,22.86) 57.912,27.075 v2(58.839,28.002)
Net9-5_6: 9-5.6 CB.2 L1.1 | length 8.4
  Top Layer w0.3: 9-5.6 54.422,24.45 54.722,24.75 54.867,24.75 55.072,24.955 55.072,28.656 55.88,29.464 CB.2 CB.2@58.218,29.569
Net(U)ESP32-S3_3: (U)ESP32-S3.3 C2.1 R10.1 | length 3.8
  Top Layer w0.3: R10.1 69.706,41.4 C2.1 ; C2.1@71.035,41.422 71.154,41.422 71.642,41.91 73.152,41.91
Net(U)ESP32-S3_4: (U)ESP32-S3.4 R5.2 | length 28.1
  Top Layer w0.3: R5.2 61.976,21.727 70.729,30.48 v2(71.12,30.48) ; 73.152,40.64 v2(74.676,40.64)
  Bottom Layer w0.3: v2(71.12,30.48) 74.676,34.036 v2(74.676,40.64)
Net(U)ESP32-S3_7: (U)ESP32-S3.7 D1.2 Rf.1 TIA.2 | length 5
  Top Layer w0.3: TIA.2 58.352,43.938 59.147,43.938 60.702,42.383 60.702,40.99 61.052,40.64 Rf.1
Net(U)ESP32-S3_13: (U)ESP32-S3.13 R1.2 | length 6.6
  Top Layer w0.3: R1.2 68.226,25.831 71.606,29.21 73.152,29.21
Net(U)ESP32-S3_14: (U)ESP32-S3.14 R6.2 | length 3.8
  Top Layer w0.3: R6.2 70.481,25.831 72.29,27.64 72.852,27.64 73.152,27.94
Net(U)ESP32-S3_17: (U)ESP32-S3.17 CP.1 R2.1 R4.2 R_FBC.2 | length 28.1
  Top Layer w0.3: CP.1 69.839,43.815 69.664,43.64 69.664,43.04 68.222,41.598 68.222,41.34 R4.2 68.072,41.115 68.372,40.815 68.517,40.815 68.722,40.61 68.722,38.901 67.522,37.701 R_FBC.2 67.597,36.068 67.747,35.918 67.747,35.773 68.102,35.418 68.601,35.418 68.83,35.189 68.83,34.894 69.18,34.544 R2.1 69.28,34.544 71.216,32.608 71.709,32.608 v2(71.805,32.512) ; v2(77.216,28.448) 77.216,26.931 77.457,26.69
  Bottom Layer w0.3: v2(71.805,32.512) 70.37,31.077 70.37,30.169 72.091,28.448 v2(77.216,28.448)
NetC3_2: C3.2 R7.2 Ro.1 TIA.3 | length 6.4
  Top Layer w0.3: Ro.1 54.864,44.878 55.214,44.528 56.076,44.528 56.328,44.276 56.328,44.116 56.033,44.116 55.821,43.904 55.821,43.437 55.056,42.672 R7.2 ; C3.2@56.388,44.176 56.448,44.116 56.743,44.116 57.075,43.784 57.075,43.77 57.407,43.438 58.202,43.438 TIA.3
NetCP_2: CP.2 POT.2 R4.1 | length 36
  Top Layer w0.254: POT.2 54.356,36.316 55.258,37.218 55.258,39.048 52.829,41.477 52.829,45.705 54.229,47.105 58.872,47.105 58.926,47.05 63.569,47.05 63.762,47.243 63.762,48.085 63.954,48.277 71.174,48.277 71.366,48.085 71.366,45.737 70.714,45.085 CP.2
NetCP_3: CP.3 R_FBC.1 Rf.2 TIA.6 | length 16.8
  Top Layer w0.3: Rf.2 59.852,40.64 60.202,40.29 60.202,39.995 60.407,39.79 61.797,39.79 62.66,40.653 62.66,41.301 63.702,42.343 63.702,43.083 63.497,43.288 TIA.6@62.702,43.288 ; TIA.6 TIA.6@62.702,43.288 ; CP.3 69.839,46.355 66.624,43.14 63.945,43.14 63.797,43.288 TIA.6@62.702,43.288
NetLED1_2: LED1.2 R5.1 | length 2.1
  Top Layer w0.3: LED1.2 R5.1
NetR11_1: R11.1 USB-C.B5 | length 5.4
  Top Layer w0.3: USB-C.B5 70.571,21.097 72.334,22.86 R11.1
NetR100_1: R100.1 USB-C.A5 | length 3.2
  Top Layer w0.3: R100.1 65.776,22.632 66.719,21.689 66.978,21.689 67.571,21.097 USB-C.A5
OSC_IN: (U)ESP32-S3.21 C5.1 Y1.1 | length 11
  Top Layer w0.3: Y1.1 82.296,17.014 C5.1 82.296,21.747 82.047,21.997 81.592,21.997 81.343,22.246 81.343,23.721 82.237,24.615 82.237,26.39 82.537,26.69
OSC_OUT: (U)ESP32-S3.22 C9.1 Y1.3 | length 13.5
  Top Layer w0.3: 83.807,26.69 83.507,26.39 83.507,23.076 83.883,22.7 83.883,22.246 84.088,22.041 84.542,22.041 84.836,21.747 C9.1 84.836,18.182 85.112,17.906 85.112,15.598 84.212,14.698 Y1.3
USB_N: R6.1 USB-C.A7 USB-C.B7 | length 2.6
  Top Layer w0.3: USB-C.B7 68.071,21.097 68.276,21.302 68.866,21.302 69.071,21.097 USB-C.A7
USB_P: R1.1 USB-C.A6 USB-C.B6 | length 2.6
  Top Layer w0.3: USB-C.A6 68.571,19.657 68.776,19.452 69.366,19.452 69.571,19.657 69.571,19.952 USB-C.B6
VBAT: ON/OFF.2 VBAT.1 | length 11.1
  Top Layer w0.3: ON/OFF.2 49.784,20.32 56.388,13.716 VBAT.1
VBAT_SW: 9-5.4 9-5.5 CIN.1 ON/OFF.3 | length 3.3
  Top Layer w0.3: CIN.1 53.62,25.198 53.822,25.4 9-5.5 9-5.4
pads on no net: (U)ESP32-S3.5 (U)ESP32-S3.6 (U)ESP32-S3.8 (U)ESP32-S3.9 (U)ESP32-S3.10 (U)ESP32-S3.11 (U)ESP32-S3.12 (U)ESP32-S3.15 (U)ESP32-S3.16 (U)ESP32-S3.18 (U)ESP32-S3.19 (U)ESP32-S3.20 (U)ESP32-S3.23 (U)ESP32-S3.24 (U)ESP32-S3.25 (U)ESP32-S3.26 (U)ESP32-S3.28 (U)ESP32-S3.29 (U)ESP32-S3.30 (U)ESP32-S3.31 (U)ESP32-S3.32 (U)ESP32-S3.33 (U)ESP32-S3.34 (U)ESP32-S3.35 (U)ESP32-S3.36 (U)ESP32-S3.37 (U)ESP32-S3.38 (U)ESP32-S3.39 CP.7 ON/OFF.1 ON/OFF.4 ON/OFF.5 ON/OFF.6 TIA.1 TIA.5 TIA.8 USB-C.A8 USB-C.B8

## Polygon pours and split planes (outlines as drawn)
GND on Bottom Layer "GND_L-01_P-001" (solid, shelved, pour order 0): 0.185,51.499 0.185,-9.969 92.641,-9.969 92.641,51.499
5V_CLEAN on Top Layer "GND_L-01_P-001" (solid, pour order 22): 62.992,33.02 62.992,30.988 62.484,30.48 61.976,30.48 61.976,28.448 60.452,26.924 59.436,26.924 59.413,26.901 59.413,26.061 62.331,26.061 62.484,25.908 62.992,26.416 62.992,29.464 64.008,30.48
VBAT_SW on Top Layer "GND_L-01_P-001" (solid, pour order 14): 46.736,26.416 46.736,23.368 52.324,23.368 52.324,24.892 54.864,24.892 55.072,25.1 55.072,26.806 52.95,26.806 52.832,26.924 52.832,25.908 50.292,25.908
BOOT on Top Layer "GND_L-01_P-001" (solid, pour order 11): 89.916,28.448 89.916,22.86 96.012,22.86 96.012,24.384 92.964,24.384 92.964,26.924 94.996,26.924 94.996,28.448
GND on Top Layer "GND_L-01_P-001" (solid, pour order 7): 91.44,45.212 72.136,45.212 72.136,43.688 75.184,43.688 75.184,29.464 86.36,29.464 86.36,38.608 91.44,43.688
no net on Top Layer "GND_L-01_P-001" (solid, pour order 10): 84.836,17.78 83.312,17.78 83.312,16.256 82.296,15.24 81.788,15.24 81.788,13.716 83.312,13.716 83.312,15.24 83.82,15.748 84.836,15.748

## Other copper
Top Layer:
  text "ESP_Layout_2.1" at 40.132,47.752 h1.52
  text "GND" at 51.562,10.414 h1.52

## Silkscreen, mask and mechanical layers (free items; w line width, h text height)
Mechanical 1:
  the board outline again, w0.254